# EAGLE board SplinktegratedXIAO v20 (EAGLE 9.7.0)
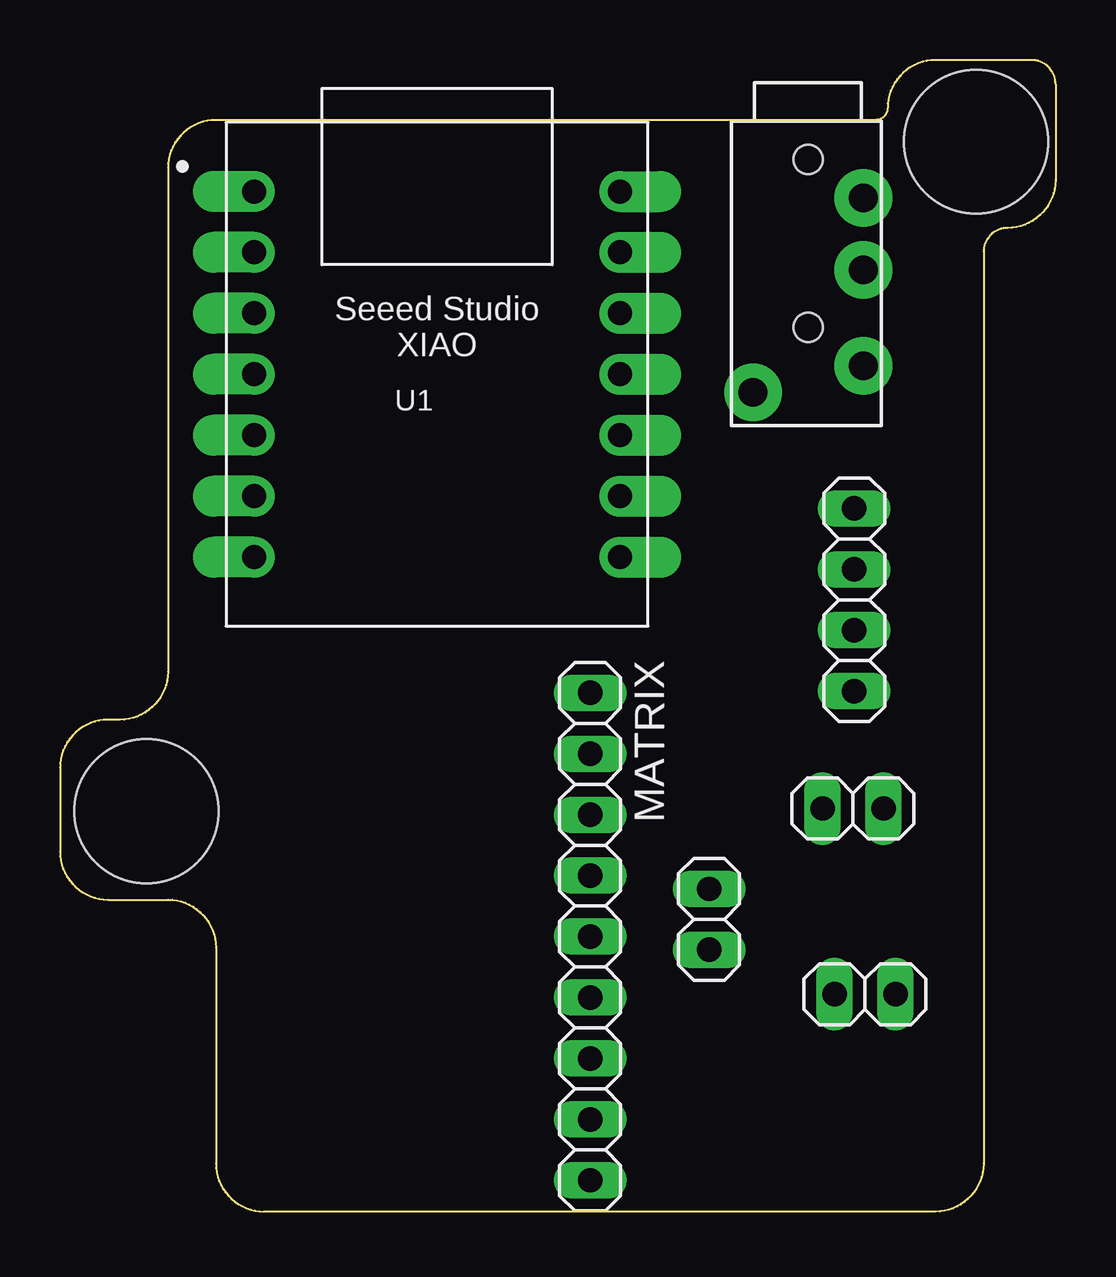
[diagram p0: board, top side]
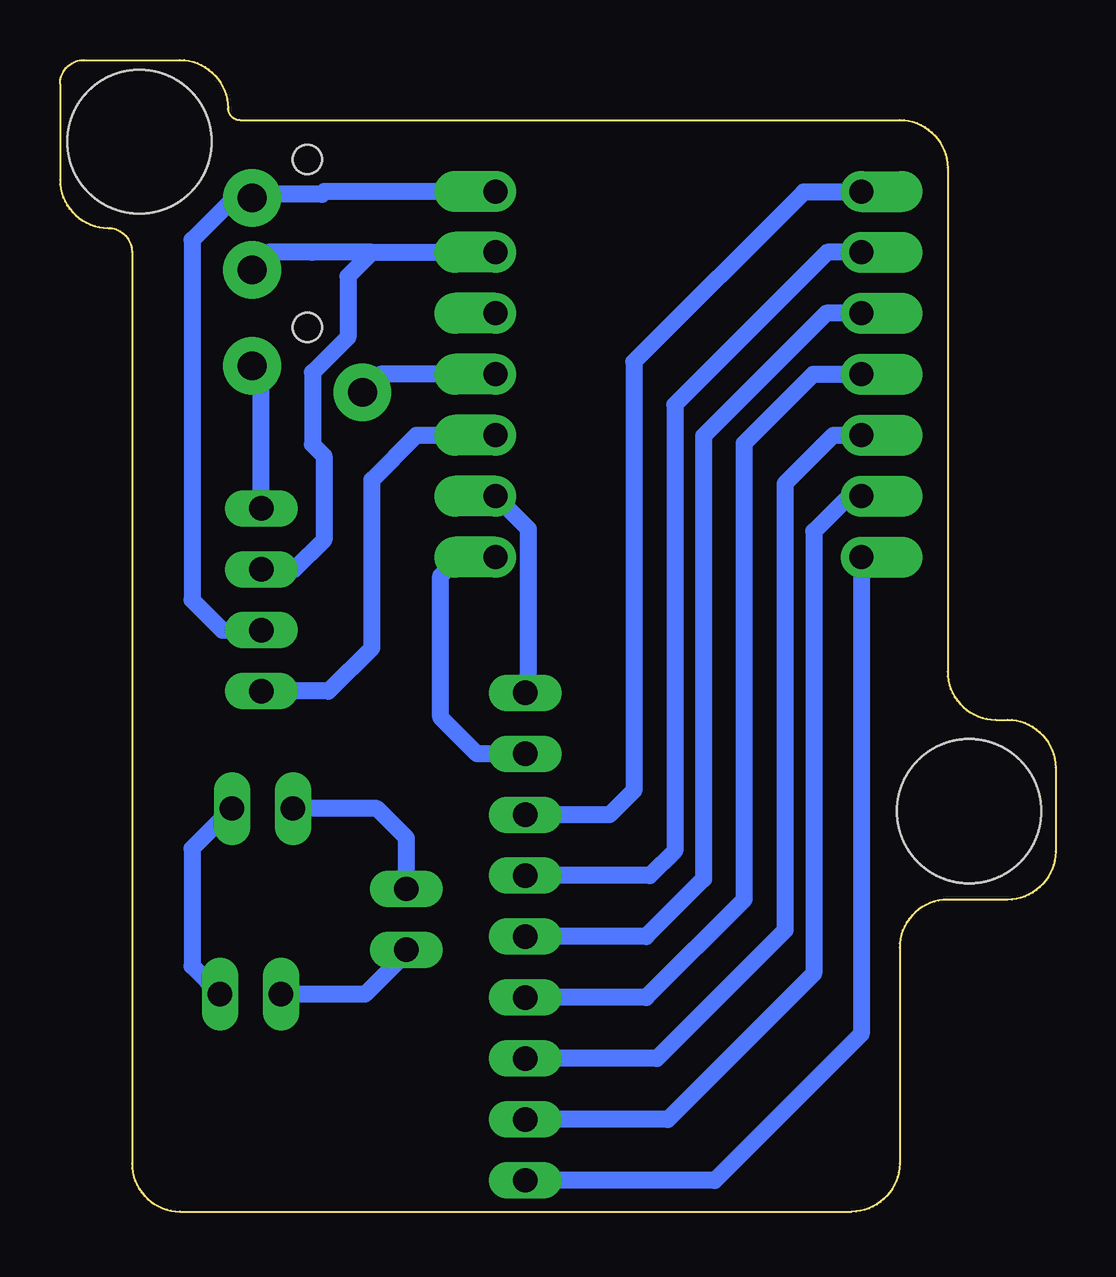
[diagram p1: board, bottom side, seen from below]

Size 41.5 x 48 mm. Coordinates in mm from the lower left corner, seen from the top.
Outline: 40.5,48 36.5,48 arc90 34.5,46 arc-90 34,45.5 6.5,45.5 arc90 4.5,43.5 4.5,22.5 arc-90 2.5,20.5 2,20.5 arc90 0,18.5 0,15 arc90 2,13 4.5,13 arc-90 6.5,11 6.5,2 arc90 8.5,0 36.5,0 arc90 38.5,2 38.5,40 arc-90 39.5,41 arc90 41.5,43 41.5,47 arc90 40.5,48
Copper layers (1*16): Top / Bottom
Stack-up Default Layer Stack: Top User Defined 0.035mm / Dielectric-1 User Defined 1.5mm / Bottom User Defined 0.035mm
Design rules: minimum copper width 0.7mm, minimum drill size 0.35mm, copper clearance wire_polygon to wire_polygon 0.5mm, copper clearance wire_polygon to pad_smd 6mil, copper clearance wire_polygon to via 6mil, copper clearance pad_smd to pad_smd 6mil, copper clearance pad_smd to via 6mil, copper clearance via to via 6mil, copper clearance smd to pad (same net) 6mil, copper clearance smd to via (same net) 6mil, copper clearance smd to smd (same net) 6mil, dimension clearance 0.5mm, via restrict clearance 0mil, restrict clearance 0mil, drill distance 6mil, keepout clearance 0mil
Holes 6 mm at 38.19,44.59 3.6,16.69

## Footprints (pad centres in the part's own frame; a part is rotated, then mirrored left to right if it is on the bottom)
1X02 = drill 1.016 long: 1 -1.27,0; 2 1.27,0
1X09 = drill 1.016 long: 1 -10.16,0; 2 -7.62,0; 3 -5.08,0; 4 -2.54,0; 5 0,0; 6 2.54,0; 7 5.08,0; 8 7.62,0; 9 10.16,0
XIAO-GENERIC-HYBRID-MODULE14P-2.54-21X17.8MM = drill 1 pad 1.7 offset: 1 -7.62,7.62; 2 -7.62,5.08; 3 -7.62,2.54; 4 -7.62,0; 5 -7.62,-2.54; 6 -7.62,-5.08; 7 -7.62,-7.62; 8 7.62,-7.62; 9 7.62,-5.08; 10 7.62,-2.54; 11 7.62,0; 12 7.62,2.54; 13 7.62,5.08; 14 7.62,7.62
PJ320A = drill 1.2 pad 2.4: 2 0,0; 3 3,0; 4 7,0; 5 8.1,-4.6 | hole 1.2: 5.4,-2.3; -1.6,-2.3
1X04 = drill 1.016 long: 1 -3.81,0; 2 -1.27,0; 3 1.27,0; 4 3.81,0

## Placement (x,y rotation side)
BATTERY  PINHD-1X02_1X02M  [1X02]  33.56,9.06 0 top
BATTERY_SWITCH  PINHD-1X02_1X02M  [1X02]  27.06,12.18 270 top
BMS  PINHD-1X02_1X02M  [1X02]  33.06,16.8 180 top
MATRIX  PINHD-1X09_1X09M  [1X09]  22.1,11.46 270 top
U1  XIAO-THRUHOLEHYBRID-SMT-THT  [XIAO-GENERIC-HYBRID-MODULE14P-2.54-21X17.8MM]  15.72,34.9 0 top
U$1  PJ320A  [PJ320A]  33.49,42.25 270 top
U$2  PINHD-1X04_1X04M  [1X04]  33.11,25.5 270 top

## Library data of the parts
BATTERY BATTERY_SWITCH BMS MATRIX U$2 = Tinkercad
U1 = Seeed Studio XIAO Series
U$1 = ChocV2

## Nets
+3.3V: U1.12
+5V: U1.14 U$1.2 U$2.3
COMM: U1.11 U$1.5
GND: U1.13 U$1.3 U$2.2
N$1: BATTERY.2 BMS.1
N$2: BATTERY_SWITCH.1 BMS.2
N$3: BATTERY.1 BATTERY_SWITCH.2
N$4: MATRIX.1 U1.9
N$5: MATRIX.2 U1.8
N$6: MATRIX.3 U1.1
N$7: MATRIX.4 U1.2
N$8: MATRIX.5 U1.3
N$9: MATRIX.6 U1.4
N$10: MATRIX.7 U1.5
N$11: MATRIX.8 U1.6
N$12: MATRIX.9 U1.7
RGB: U1.10 U$2.4
RGBCONTINUED: U$1.4 U$2.1

## Tracks (layer width: path | path; a pad name or v marks a point on that pad's centre or on a via)
+5V
  Bottom 0.7: U1.14 30.47,42.52 30.59,42.4 33.34,42.4 U$1.2 | U$1.2 34.1,42.25 | U$1.2 34.25,42.25 36,40.5 36,25.5 34.73,24.23 U$2.3
COMM
  Bottom 0.7: U1.11 28.14,34.9 U$1.5
GND
  Bottom 0.7: 28.5,39.98 U1.13 | 28.5,39.98 30.98,39.98 31,40 32.74,40 U$1.3 | 28.5,39.98 29.5,38.98 29.5,36.45 30.97,34.97 30.97,31.97 30.5,31.5 30.5,28 31.73,26.77 U$2.2
N$1
  Bottom 0.7: BMS.1 36,15.13 36,10.23 BATTERY.2
N$2
  Bottom 0.7: BATTERY_SWITCH.1 27.06,15.57 28.29,16.8 BMS.2
N$3
  Bottom 0.7: BATTERY_SWITCH.2 27.06,10.79 28.79,9.06 BATTERY.1
N$4
  Bottom 0.7: MATRIX.1 21.99,21.73 21.99,28.47 U1.9
N$5
  Bottom 0.7: U1.8 24.84,27.28 25.63,26.49 25.63,20.6 24.11,19.08 MATRIX.2
N$6
  Bottom 0.7: U1.1 8.12,42.5 10.5,42.5 17.57,35.43 17.57,17.54 17.6,17.54 18.6,16.54 MATRIX.3
N$7
  Bottom 0.7: U1.2 9.52,39.98 15.87,33.63 15.87,15.04 16.91,14 MATRIX.4
N$8
  Bottom 0.7: U1.3 9.56,37.44 14.67,32.33 14.67,13.86 17.07,11.46 MATRIX.5
N$9
  Bottom 0.7: MATRIX.6 17.07,8.92 12.97,13.02 12.97,32.03 10.1,34.9 U1.4
N$10
  Bottom 0.7: MATRIX.7 16.62,6.38 11.27,11.73 11.27,30.34 9.26,32.36 U1.5
N$11
  Bottom 0.7: U1.6 8.6,29.82 10.07,28.35 10.07,9.93 16.16,3.84 MATRIX.8
N$12
  Bottom 0.7: U1.7 8.1,7.4 14.2,1.3 MATRIX.9
RGB
  Bottom 0.7: 25.61,32.36 U1.10 26.64,32.36 28.5,30.5 28.5,23.5 30.31,21.69 U$2.4
RGBCONTINUED
  Bottom 0.7: U$2.1 33.11,34.87 U$1.4